# Altium PCB PCB(Altium).PcbDoc
Units mil, origin at the board's own origin, x right, y up, seen from the top; angles counter-clockwise.
Board outline 6000 x 4000 mil, 2 copper layers (Top Layer, Bottom Layer); 1 components, 0 nets, 18 pads, 0 vias.
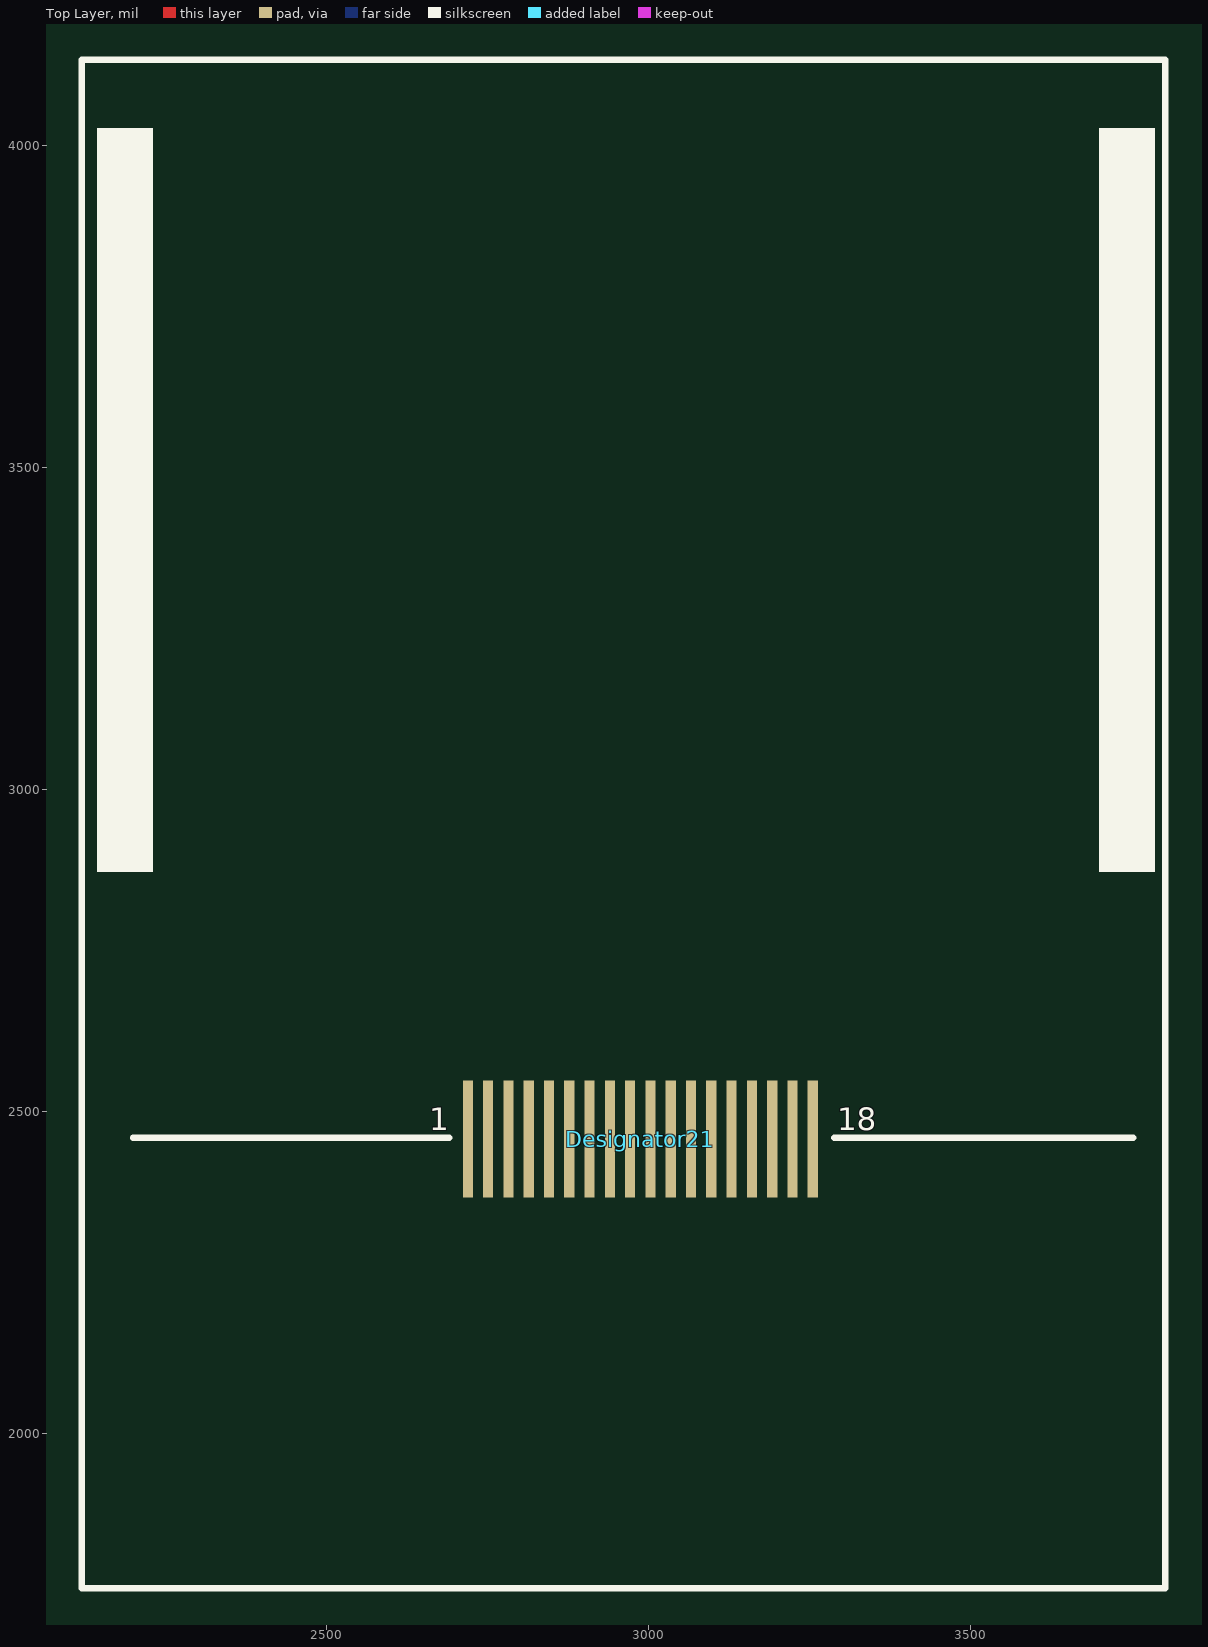
[diagram p0: Top Layer view]
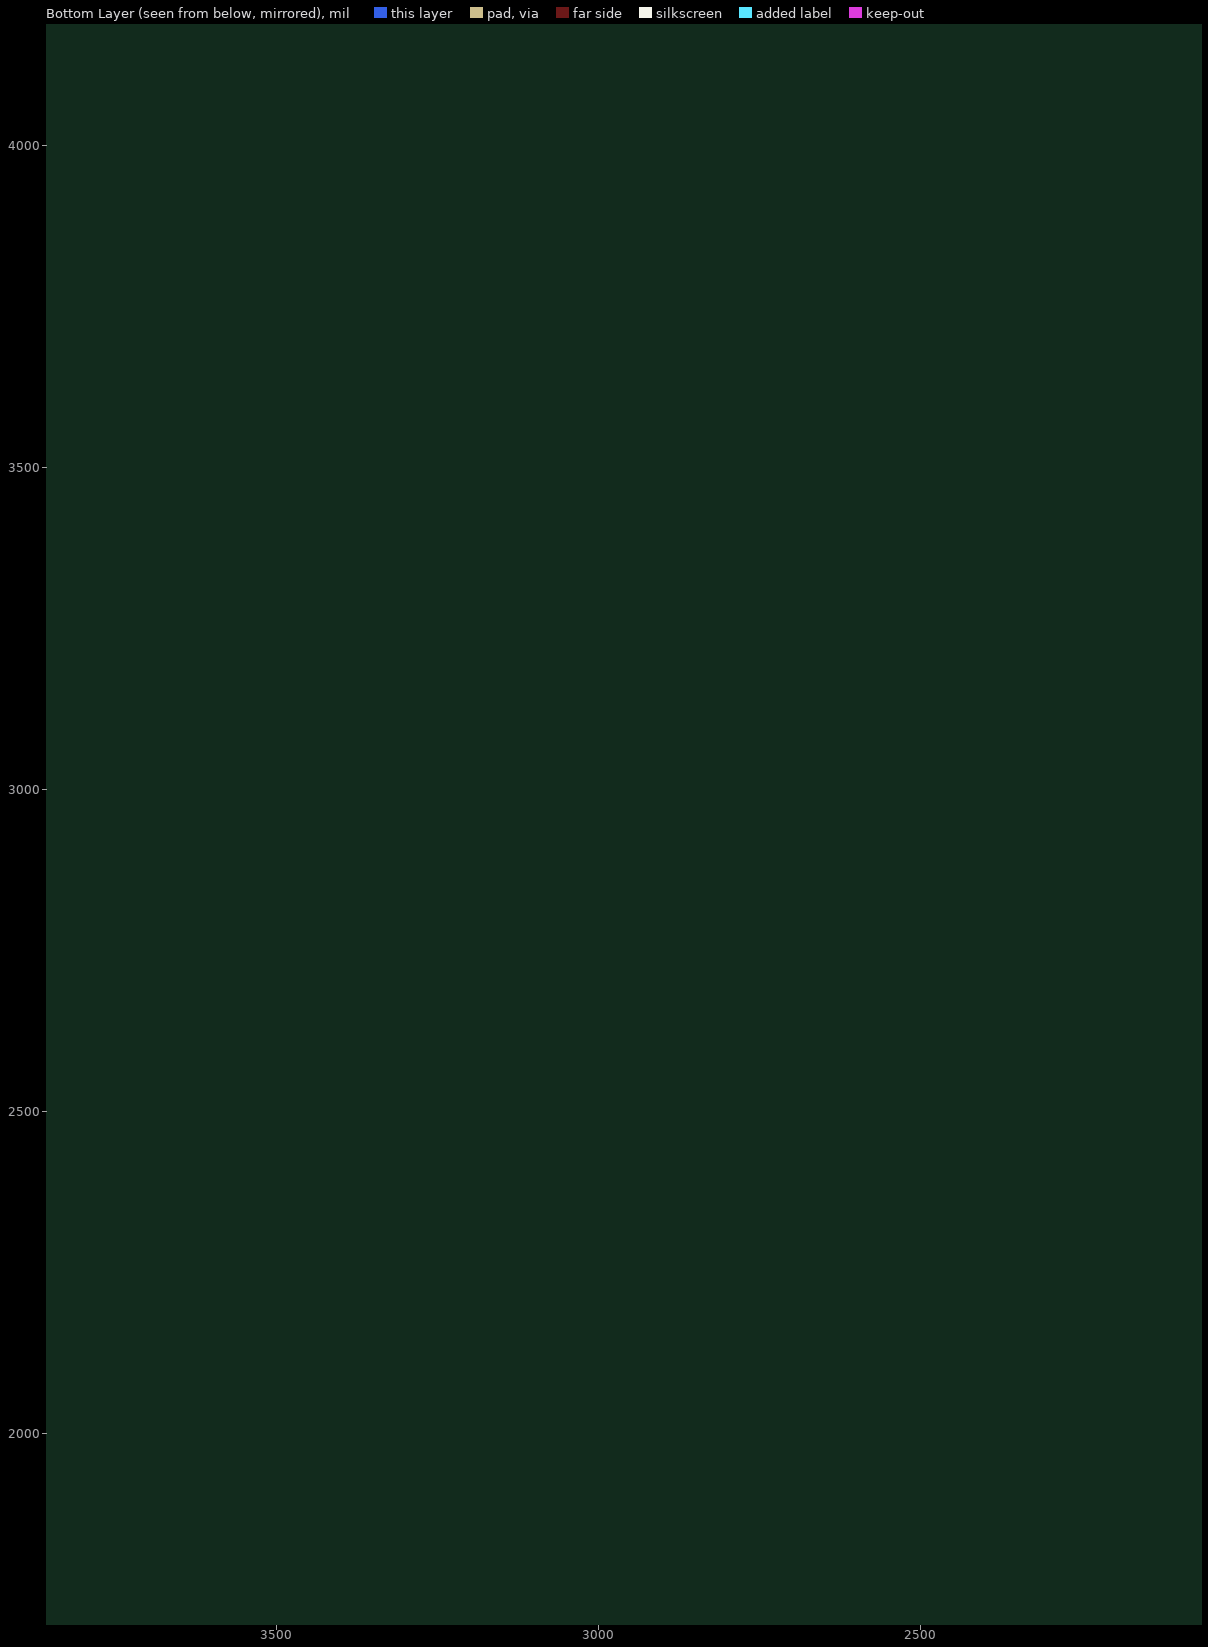
[diagram p1: Bottom Layer view, seen from below]

## Layer stack, top to bottom
Top Layer: signal copper 1.4
Dielectric: dielectric 12.6, FR-4, Dk 4.8
Bottom Layer: signal copper 1.4

## Board outline
1000,1000 7000,1000 7000,5000 1000,5000

## Design rules (kind name [scope] priority, off if disabled: settings)
Clearance [All] p1: gap=10
PolygonConnect [All] p1: connectstyle=Relief reliefconductorwidth=10 reliefentries=4 polygonreliefangle="90 Angle"
RoutingVias [All] p1: holewidth=28 width=50 viastyle="Through Hole" minholewidth=28 minwidth=50 maxholewidth=28 maxwidth=50
SilkscreenOverComponentPads [All] p1: minsilkscreentomaskgap=10
SolderMaskExpansion [All] p1: expansion=4
Width [All] p1: maxlimit=10 minlimit=10 preferedwidth=10
27 further rules are at their usual default settings.

## Components (designator, comment, footprint, x,y, rotation, side; value= is the part's Value field where it differs from the comment)
Designator21 "Comment" FPC240A8230-V1-E 2120,1760 r0 top

## Footprints (in the part's own frame and the unit in brackets; to place one, negate y for a bottom-side part, rotate by r counter-clockwise, add the part's x,y. Pads: shape width x height; smd on the part's side, far side on the other; paste and mask are expansions set on the pad)
FPC240A8230-V1-E [mm]
  rect 0.4x4.6 smd: 1(15.22,17.709) 2(16.02,17.709) 3(16.82,17.709) 4(17.62,17.709) 5(18.42,17.709) 6(19.22,17.709) 7(20.02,17.709) 8(20.82,17.709) 9(21.62,17.709) 10(22.42,17.709) 11(23.22,17.709) 12(24.02,17.709) 13(24.82,17.709) 14(25.62,17.709) 15(26.42,17.709) 16(27.22,17.709) 17(28.02,17.709) 18(28.82,17.709)
  silkscreen extent 0,0 42.72,60.26

## Nets (pads, with @x,y where several pads share a name; then routed paths per layer and width w, separated by ;. In a path a pad name is that pad's centre, name@x,y a point inside that pad or via, vN(x,y) a via of type N, cw(c..) or ccw(c..) an arc to the next point about the centre after c; other vN are vias at no path point)
pads on no net: Designator21.1 Designator21.2 Designator21.3 Designator21.4 Designator21.5 Designator21.6 Designator21.7 Designator21.8 Designator21.9 Designator21.10 Designator21.11 Designator21.12 Designator21.13 Designator21.14 Designator21.15 Designator21.16 Designator21.17 Designator21.18

## Text inside footprints (layer, text, board x,y; h text height)
Designator21: Top Overlay "18" at 3292.94,2471.1 h35; Top Overlay "1" at 2658.94,2471.1 h35